# Altium PCB RF_load.PcbDoc
Units mm, origin at the board's own origin, x right, y up, seen from the top; angles counter-clockwise.
Board outline 65.25 x 20 mm, 2 copper layers (Top Layer, Bottom Layer); 45 components, 3 nets, 96 pads, 44 vias.
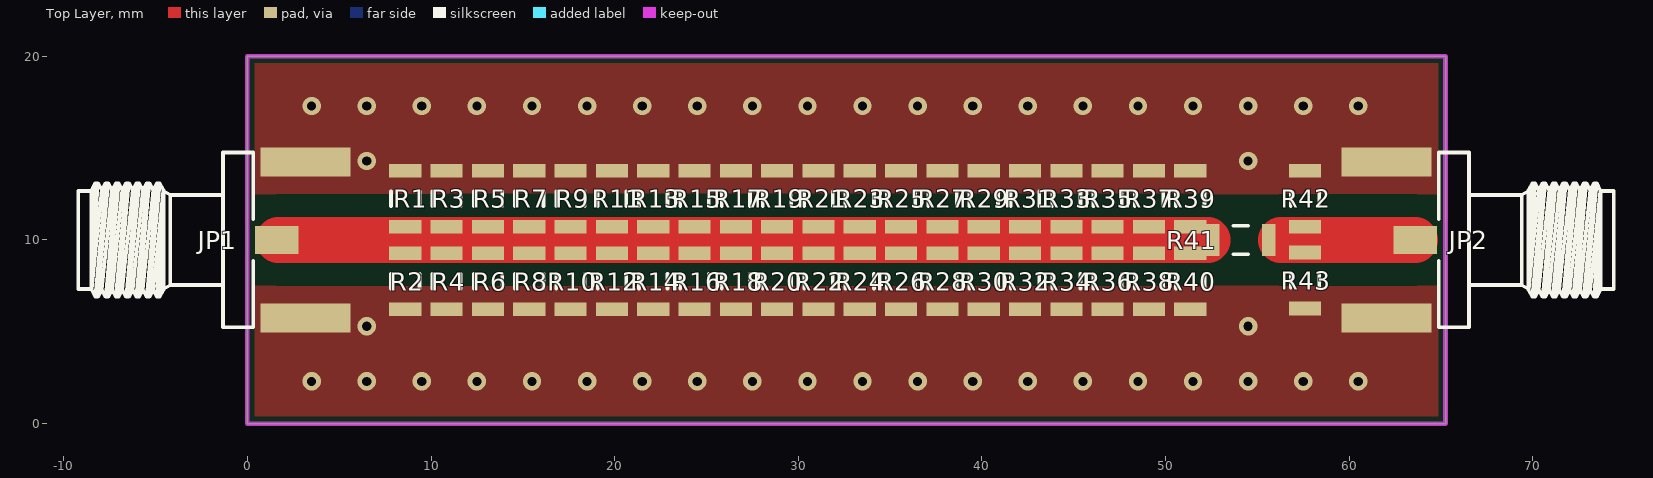
[diagram p0: Top Layer view]
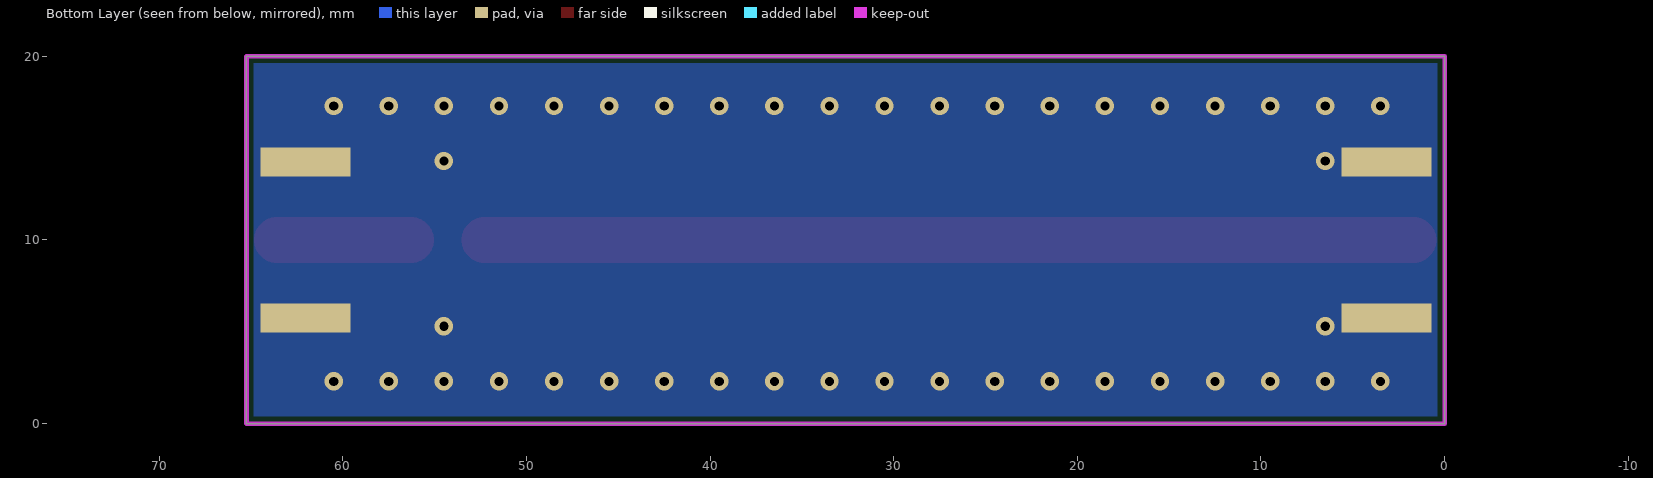
[diagram p1: Bottom Layer view, seen from below]
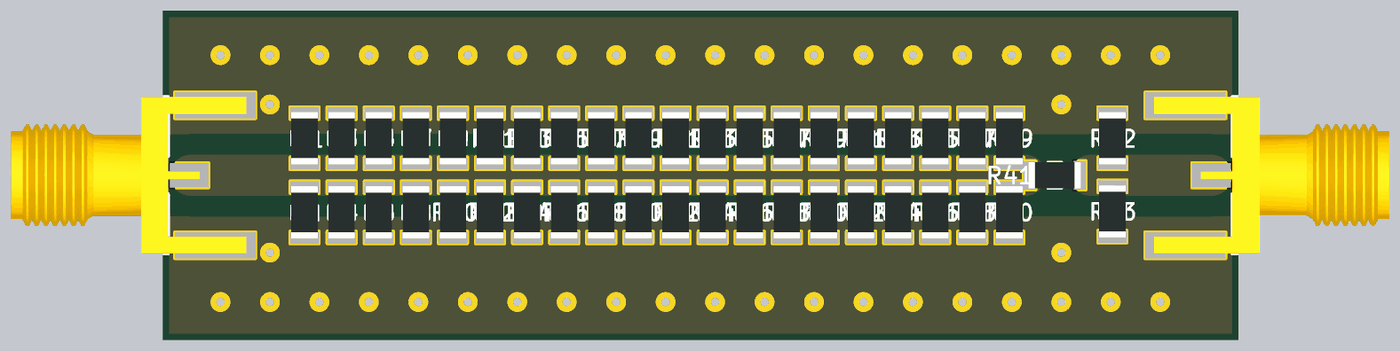
[diagram p2: 3D render of the assembled board from above, using the file's embedded part models]

## Layer stack, top to bottom
Top Solder: solder mask 0.0102, Solder Resist, Dk 3.5
Top Layer: signal copper 0.0356
Dielectric 1: dielectric 0.32, FR-4, Dk 4.8
Bottom Layer: signal copper 0.0356
Bottom Solder: solder mask 0.0102, Solder Resist, Dk 3.5

## Board outline
0,0 65.25,0 65.25,20 0,20

## Design rules (kind name [scope] priority, off if disabled: settings)
Clearance Clearance_2 [InNamedPolygon('GND_L01_P000') Or InNamedPolygon('GND_L01_P001') vs InNet('NetJP2_1')] p1: gap=1.25 ignorepadtopadclearanceinfootprint=FALSE
Clearance Clearance_1 [InNamedPolygon('GND_L01_P000') Or InNamedPolygon('GND_L01_P001') vs InNet('NetJP1_1')] p2: gap=1.25 ignorepadtopadclearanceinfootprint=FALSE
Clearance [All] p3: gap=0.254 ignorepadtopadclearanceinfootprint=FALSE except(0: Arc-Hole Track-Hole SMDPad-Hole THPad-Hole Via-Hole Fill-Hole Poly-Hole Region-Hole Text-Hole)
PolygonConnect PolygonConnect_2 [All vs IsNamedPolygon('GND_L02_P002')] p1: connectstyle=Direct reliefconductorwidth=0.254 reliefentries=4 polygonreliefangle="90 Angle" airgapwidth=0.254
PolygonConnect PolygonConnect_1 [All vs IsNamedPolygon('GND_L01_P000') Or IsNamedPolygon('GND_L01_P001')] p2: connectstyle=Direct reliefconductorwidth=0.254 reliefentries=4 polygonreliefangle="90 Angle" airgapwidth=0.254
PolygonConnect [All] p3: connectstyle=Relief reliefconductorwidth=0.254 reliefentries=4 polygonreliefangle="90 Angle" airgapwidth=0.254
RoutingVias [All] p1: holewidth=0.711 width=1.27 viastyle="Through Hole" minholewidth=0.711 minwidth=1.27 maxholewidth=0.711 maxwidth=1.27
SolderMaskExpansion [All] p1: expansion=0.102 istentingtop=FALSE
Width [All] p1: maxlimit=5 minlimit=0.25 preferedwidth=2.5
30 further rules are at their usual default settings.

## Components (designator, comment, footprint, x,y, rotation, side; value= is the part's Value field where it differs from the comment)
JP1 "RF connector" AMPHENOL_132357-11 1.6,10 r0 top
JP2 "RF connector" AMPHENOL_132357-11 63.6,10 r180 top
R1 "2k" "R-1206 _narrow" 8.6,12.25 r90 top
R2 "2k" "R-1206 _narrow" 8.6,7.75 r90 top
R3 "2k" "R-1206 _narrow" 10.85,12.25 r90 top
R4 "2k" "R-1206 _narrow" 10.85,7.75 r90 top
R5 "2k" "R-1206 _narrow" 13.1,12.25 r90 top
R6 "2k" "R-1206 _narrow" 13.1,7.75 r90 top
R7 "2k" "R-1206 _narrow" 15.35,12.25 r90 top
R8 "2k" "R-1206 _narrow" 15.35,7.75 r90 top
R9 "2k" "R-1206 _narrow" 17.6,12.25 r90 top
R10 "2k" "R-1206 _narrow" 17.6,7.75 r90 top
R11 "2k" "R-1206 _narrow" 19.85,12.25 r90 top
R12 "2k" "R-1206 _narrow" 19.85,7.75 r90 top
R13 "2k" "R-1206 _narrow" 22.1,12.25 r90 top
R14 "2k" "R-1206 _narrow" 22.1,7.75 r90 top
R15 "2k" "R-1206 _narrow" 24.35,12.25 r90 top
R16 "2k" "R-1206 _narrow" 24.35,7.75 r90 top
R17 "2k" "R-1206 _narrow" 26.6,12.25 r90 top
R18 "2k" "R-1206 _narrow" 26.6,7.75 r90 top
R19 "2k" "R-1206 _narrow" 28.85,12.25 r90 top
R20 "2k" "R-1206 _narrow" 28.85,7.75 r90 top
R21 "2k" "R-1206 _narrow" 31.1,12.25 r90 top
R22 "2k" "R-1206 _narrow" 31.1,7.75 r90 top
R23 "2k" "R-1206 _narrow" 33.35,12.25 r90 top
R24 "2k" "R-1206 _narrow" 33.35,7.75 r90 top
R25 "2k" "R-1206 _narrow" 35.6,12.25 r90 top
R26 "2k" "R-1206 _narrow" 35.6,7.75 r90 top
R27 "2k" "R-1206 _narrow" 37.85,12.25 r90 top
R28 "2k" "R-1206 _narrow" 37.85,7.75 r90 top
R29 "2k" "R-1206 _narrow" 40.1,12.25 r90 top
R30 "2k" "R-1206 _narrow" 40.1,7.75 r90 top
R31 "2k" "R-1206 _narrow" 42.35,12.25 r90 top
R32 "2k" "R-1206 _narrow" 42.35,7.75 r90 top
R33 "2k" "R-1206 _narrow" 44.6,12.25 r90 top
R34 "2k" "R-1206 _narrow" 44.6,7.75 r90 top
R35 "2k" "R-1206 _narrow" 46.85,12.25 r90 top
R36 "2k" "R-1206 _narrow" 46.85,7.75 r90 top
R37 "2k" "R-1206 _narrow" 49.1,12.25 r90 top
R38 "2k" "R-1206 _narrow" 49.1,7.75 r90 top
R39 "2k" "R-1206 _narrow" 51.35,12.25 r90 top
R40 "2k" "R-1206 _narrow" 51.35,7.75 r90 top
R41 "750" "R-1206 _narrow" 54.1,10 r180 top
R42 "100" "R-1206 _narrow" 57.6,12.25 r90 top
R43 "100" "R-1206 _narrow" 57.6,7.8 r90 top

## Footprints (in the part's own frame and the unit in brackets; to place one, negate y for a bottom-side part, rotate by r counter-clockwise, add the part's x,y. Pads: shape width x height; smd on the part's side, far side on the other; paste and mask are expansions set on the pad)
AMPHENOL_132357-11 [mm] "SMA End Launch Jack for 1.58mm PCB, 50 Ohm, Flat Tab Contact"
  rect 2.35x1.5 smd: 1(0,0)
  rect 4.9x1.6 smd: 2(1.575,-4.25) 2(1.575,4.25)
  rect 4.9x1.6 smd far side: 2(1.575,-4.25) 2(1.575,4.25)
  silkscreen extent -10.81,-4.76 -1.28,4.76, body extent -10.8,-4.76 3.48,4.76, height 4.08
"R-1206 _narrow" [mm] "Chip Resistor, 2-Leads, Body 3,20x1,60mm, IPC Medium Density"
  rect 0.75x1.75 smd: 1(-1.525,0) 2(1.525,0)
  silkscreen extent -0.4,-0.77 0.4,0.77, body extent -1.6,-0.8 1.6,0.8, height 0.55

## Part data
JP1 JP2: "RF Connector", Вид=Роз'єм
R1 R2 R3 R4 R5 R6 R7 R8 R9 R10 R11 R12 R13 R14 R15 R16 R17 R18 R19 R20 R21 R22 R23 R24 R25 R26 R27 R28 R29 R30 R31 R32 R33 R34 R35 R36 R37 R38 R39 R40 R41 R42 R43: library part RES, Вид=Резистор, Точність/група=5%

## Via types
v1: diameter 1, hole 0.5, Top Layer to Bottom Layer, 44 vias

## Nets (pads, with @x,y where several pads share a name; then routed paths per layer and width w, separated by ;. In a path a pad name is that pad's centre, name@x,y a point inside that pad or via, vN(x,y) a via of type N, cw(c..) or ccw(c..) an arc to the next point about the centre after c; other vN are vias at no path point)
GND: JP1.2 JP2.2 R1.2 R2.1 R3.2 R4.1 R5.2 R6.1 R7.2 R8.1 R9.2 R10.1 R11.2 R12.1 R13.2 R14.1 R15.2 R16.1 R17.2 R18.1 R19.2 R20.1 R21.2 R22.1 R23.2 R24.1 R25.2 R26.1 R27.2 R28.1 R29.2 R30.1 R31.2 R32.1 R33.2 R34.1 R35.2 R36.1 R37.2 R38.1 R39.2 R40.1 R42.2 R43.1
  other v1: 3.5,2.3 6.5,2.3 9.5,2.3 12.5,2.3 15.5,2.3 18.5,2.3 21.5,2.3 24.5,2.3 27.5,2.3 30.5,2.3 33.5,2.3 36.5,2.3 39.5,2.3 42.5,2.3 45.5,2.3 48.5,2.3 51.5,2.3 54.5,2.3 57.5,2.3 60.5,2.3 6.5,5.3 54.5,5.3 6.5,14.3 54.5,14.3 3.5,17.3 6.5,17.3 9.5,17.3 12.5,17.3 15.5,17.3 18.5,17.3 21.5,17.3 24.5,17.3 27.5,17.3 30.5,17.3 33.5,17.3 36.5,17.3 39.5,17.3 42.5,17.3 45.5,17.3 48.5,17.3 51.5,17.3 54.5,17.3 57.5,17.3 60.5,17.3
NetJP1_1: JP1.1 R1.1 R2.2 R3.1 R4.2 R5.1 R6.2 R7.1 R8.2 R9.1 R10.2 R11.1 R12.2 R13.1 R14.2 R15.1 R16.2 R17.1 R18.2 R19.1 R20.2 R21.1 R22.2 R23.1 R24.2 R25.1 R26.2 R27.1 R28.2 R29.1 R30.2 R31.1 R32.2 R33.1 R34.2 R35.1 R36.2 R37.1 R38.2 R39.1 R40.2 R41.2 | length 50.6
  Top Layer w2.5: JP1.1@1.7,10 8.6,10 10.85,10 19.85,10 24.35,10 31.1,10 35.6,10 42.35,10 46.85,10 R41.2@52.3,10
NetJP2_1: JP2.1 R41.1 R42.1 R43.2 | length 7.3
  Top Layer w2.5: 56.3,10 JP2.1

## Polygon pours and split planes (outlines as drawn)
GND on Top Layer "GND_L01_P001" (solid, pour order 1): 0,20 0,12.5 65.3,12.5 65.3,20
GND on Top Layer "GND_L01_P000" (solid, pour order 0): 0,0 65.2,0 65.2,7.5 0,7.5
GND on Bottom Layer "GND_L02_P002" (solid, pour order 2): 0,0 65.2,0 65.2,20 0,20

## Keep-outs
Keep-Out Layer:
  the board outline again, w0.254